# EAGLE board Contador de 4 bits (EAGLE 7.6.0)

Size 56.82 x 53.33 mm. Coordinates in mm from the lower left corner, seen from the top.
Outline: 0,0 56.82,0 56.82,53.33 0,53.33 0,0
Copper layers (1*16): Top 0.035mm / dielectric 1.5mm / Bottom 0.035mm
Design rules "default": minimum track width 10mil, minimum drill 24mil, track to track 8mil, track to pad 8mil, pad to pad 8mil, via to via 8mil, smd to smd 8mil, copper to edge 40mil, drill to drill 8mil, minimum pad ring 10mil, minimum via ring 8mil, stop-mask expansion 4mil, vias tented up to drill 0mil, thermal gap 10mil

## Footprints (pad centres in the part's own frame; a part is rotated, then mirrored left to right if it is on the bottom)
RADIAL-D11.36MM = drill 1.27 pad 1.905 square: + -2.54,0 | drill 1.27 pad 1.905: - 2.54,0
LED5MM = drill 0.813 octagon: A -1.27,0; K 1.27,0
HDSP-M = drill 0.813 long: 1 -5.08,-7.62; 2 -2.54,-7.62; 3 0,-7.62; 4 2.54,-7.62; 5 5.08,-7.62; 6 5.08,7.62; 7 2.54,7.62; 8 0,7.62; 9 -2.54,7.62; 10 -5.08,7.62
2P-2.54-65/35MIL = drill 0.889 pad 1.651 square: 1 0,1.27 | drill 0.889 pad 1.651: 2 0,-1.27
0207/10 = drill 0.813 octagon: 1 -5.08,0; 2 5.08,0
B25V = drill 0.813 long: A 2.54,0.635; E -2.54,0.635; S 0,0.635
DIL08 = drill 0.813 pad 1.27: 1 -3.81,-3.81; 2 -1.27,-3.81; 3 1.27,-3.81; 4 3.81,-3.81; 5 3.81,3.81; 6 1.27,3.81; 7 -1.27,3.81; 8 -3.81,3.81
DIL16 = drill 0.813 long: 1 -8.89,-3.81; 2 -6.35,-3.81; 3 -3.81,-3.81; 4 -1.27,-3.81; 5 1.27,-3.81; 6 3.81,-3.81; 7 6.35,-3.81; 8 8.89,-3.81; 9 8.89,3.81; 10 6.35,3.81; 11 3.81,3.81; 12 1.27,3.81; 13 -1.27,3.81; 14 -3.81,3.81; 15 -6.35,3.81; 16 -8.89,3.81
DIL14 = drill 0.813 long: 1 -7.62,-3.81; 2 -5.08,-3.81; 3 -2.54,-3.81; 4 0,-3.81; 5 2.54,-3.81; 6 5.08,-3.81; 7 7.62,-3.81; 8 7.62,3.81; 9 5.08,3.81; 10 2.54,3.81; 11 0,3.81; 12 -2.54,3.81; 13 -5.08,3.81; 14 -7.62,3.81

## Placement (x,y rotation side)
C1  22uF  [RADIAL-D11.36MM]  5,60.88 0 top  (outside the outline)
D1  [LED5MM]  5,48.18 0 top
D2  [LED5MM]  5,111.68 0 top  (outside the outline)
D3  [LED5MM]  5,124.38 0 top  (outside the outline)
D4  [LED5MM]  5,137.08 0 top  (outside the outline)
D5  [LED5MM]  5,149.78 0 top  (outside the outline)
Digit1  [HDSP-M]  5,225.98 0 top  (outside the outline)
P1  5V  [2P-2.54-65/35MIL]  5,10.08 0 top
R1  200‎Ω  [0207/10]  5,35.48 0 top
R2  10k‎Ω  [0207/10]  5,73.58 0 top  (outside the outline)
R3  200‎Ω  [0207/10]  5,162.48 0 top  (outside the outline)
R4  200‎Ω  [0207/10]  5,175.18 0 top  (outside the outline)
R5  200‎Ω  [0207/10]  5,187.88 0 top  (outside the outline)
R6  200‎Ω  [0207/10]  5,200.58 0 top  (outside the outline)
R7  200‎Ω  [0207/10]  5,238.68 0 top  (outside the outline)
R8  200‎Ω  [0207/10]  5,251.38 0 top  (outside the outline)
R9  200‎Ω  [0207/10]  5,264.08 0 top  (outside the outline)
R10  200‎Ω  [0207/10]  5,276.78 0 top  (outside the outline)
R11  200‎Ω  [0207/10]  5,289.48 0 top  (outside the outline)
R12  200‎Ω  [0207/10]  5,302.18 0 top  (outside the outline)
R13  200‎Ω  [0207/10]  5,314.88 0 top  (outside the outline)
R14  200‎Ω  [0207/10]  5,327.58 0 top  (outside the outline)
R15  200‎Ω  [0207/10]  5,340.28 0 top  (outside the outline)
Rpot1  500k‎Ω  [B25V]  5,86.28 0 top  (outside the outline)
U1  [DIL08]  5,22.78 0 top
U2  [DIL16]  5,213.28 0 top  (outside the outline)
U3  [DIL14]  5,98.98 0 top  (outside the outline)

## Library data of the parts
C1 D1-D5 Digit1 P1 R1-R15 Rpot1 U1-U3 = AUTODESK_CIRCUITS_BREADBOARD

## Nets
N$1: D1.K R1.2
N$2: U3.13
N$3: D1.A U1.3 U3.14
N$4: U3.6
N$5: U3.7
N$6: U3.4
N$7: D2.K R3.2
N$8: D3.K R4.2
N$9: D4.K R5.2
N$10: D5.K R6.2
N$11: R11.2 U2.9
N$12: R10.2 U2.10
N$13: R9.2 U2.11
N$14: R8.2 U2.12
N$15: R7.2 U2.13
N$16: R13.2 U2.14
N$17: R12.2 U2.15
N$18: P1.2 R2.2 U1.4 U1.8 U2.3 U2.4 U2.16 U3.5
N$19: U1.5
N$20: C1.+ Rpot1.S U1.2 U1.6
N$21: D5.A U2.7 U3.1 U3.12
N$22: D3.A U2.2 U3.8
N$23: D4.A U2.1 U3.3 U3.9
N$24: D2.A U2.6 U3.2 U3.11
N$25: R2.1 Rpot1.A U1.7
N$26: C1.- P1.1 R1.1 R3.1 R4.1 R5.1 R6.1 R14.1 R15.2 U1.1 U2.5 U2.8 U3.10
N$27: Digit1.7 R7.1
N$28: Digit1.1 R11.1
N$29: Digit1.4 R9.1
N$30: Digit1.9 R12.1
N$31: Digit1.10 R13.1
N$32: Digit1.3 R14.2
N$33: Digit1.8 R15.1
N$34: Digit1.2 R10.1
N$35: Digit1.5
N$36: Digit1.6 R8.1
N$37: Rpot1.E

## Tracks (layer width: path | path; a pad name or v marks a point on that pad's centre or on a via)
N$1  (1 unrouted)
N$3  (2 unrouted)
N$7  (1 unrouted)
N$8  (1 unrouted)
N$9  (1 unrouted)
N$10  (1 unrouted)
N$11  (1 unrouted)
N$12  (1 unrouted)
N$13  (1 unrouted)
N$14  (1 unrouted)
N$15  (1 unrouted)
N$16  (1 unrouted)
N$17  (1 unrouted)
N$18  (7 unrouted)
N$20  (3 unrouted)
N$21  (3 unrouted)
N$22  (2 unrouted)
N$23  (3 unrouted)
N$24  (3 unrouted)
N$25  (2 unrouted)
N$26  (12 unrouted)
N$27  (1 unrouted)
N$28  (1 unrouted)
N$29  (1 unrouted)
N$30  (1 unrouted)
N$31  (1 unrouted)
N$32  (1 unrouted)
N$33  (1 unrouted)
N$34  (1 unrouted)
N$36  (1 unrouted)